# Altium PCB z003.pcbdoc (part 1 of 2)
Units mil, origin at the board's own origin, x right, y up, seen from the top; angles counter-clockwise.
Board outline 7198.91 x 3074 mil, 2 copper layers (Top Layer, Bottom Layer); 161 components, 182 nets, 536 pads, 602 vias.
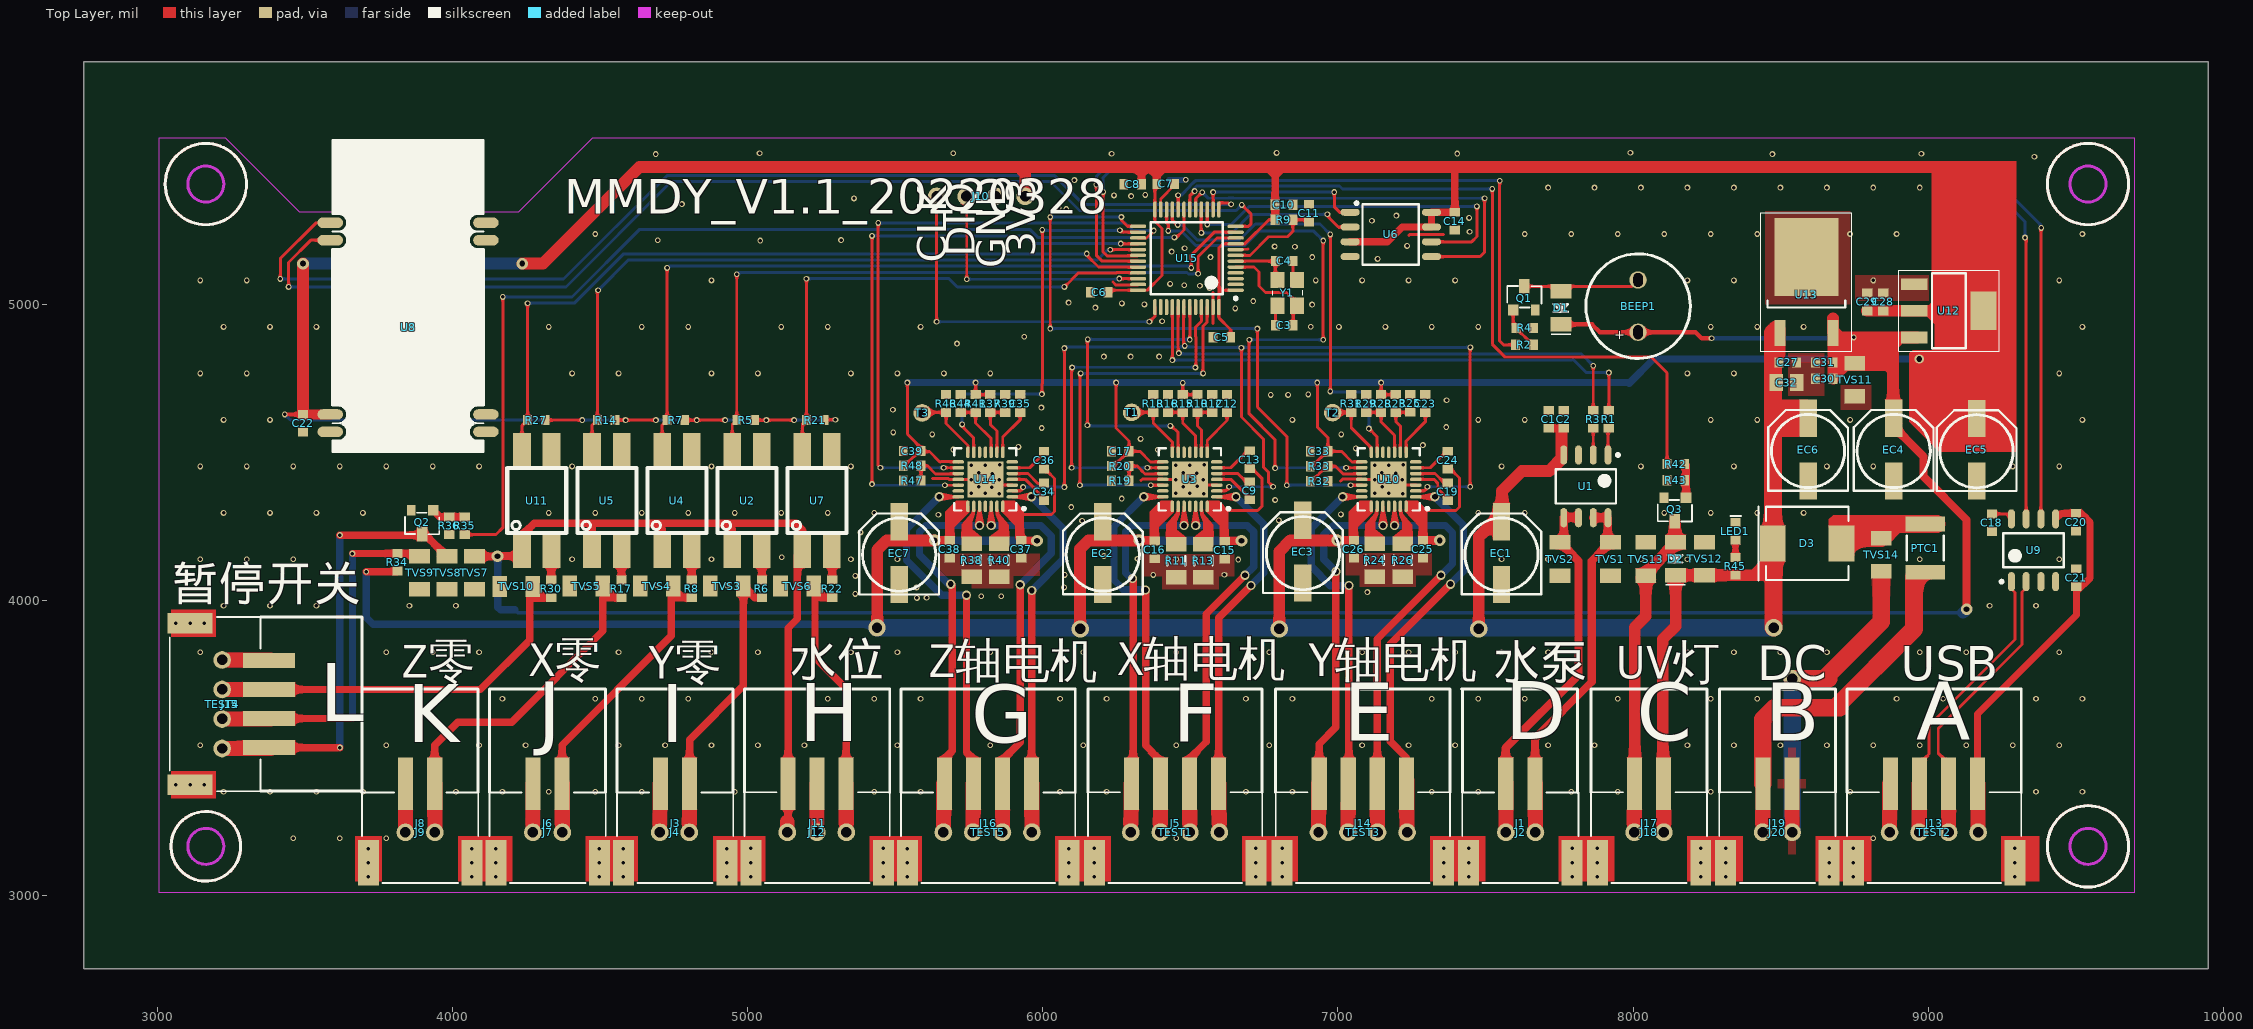
[diagram p0: Top Layer view]
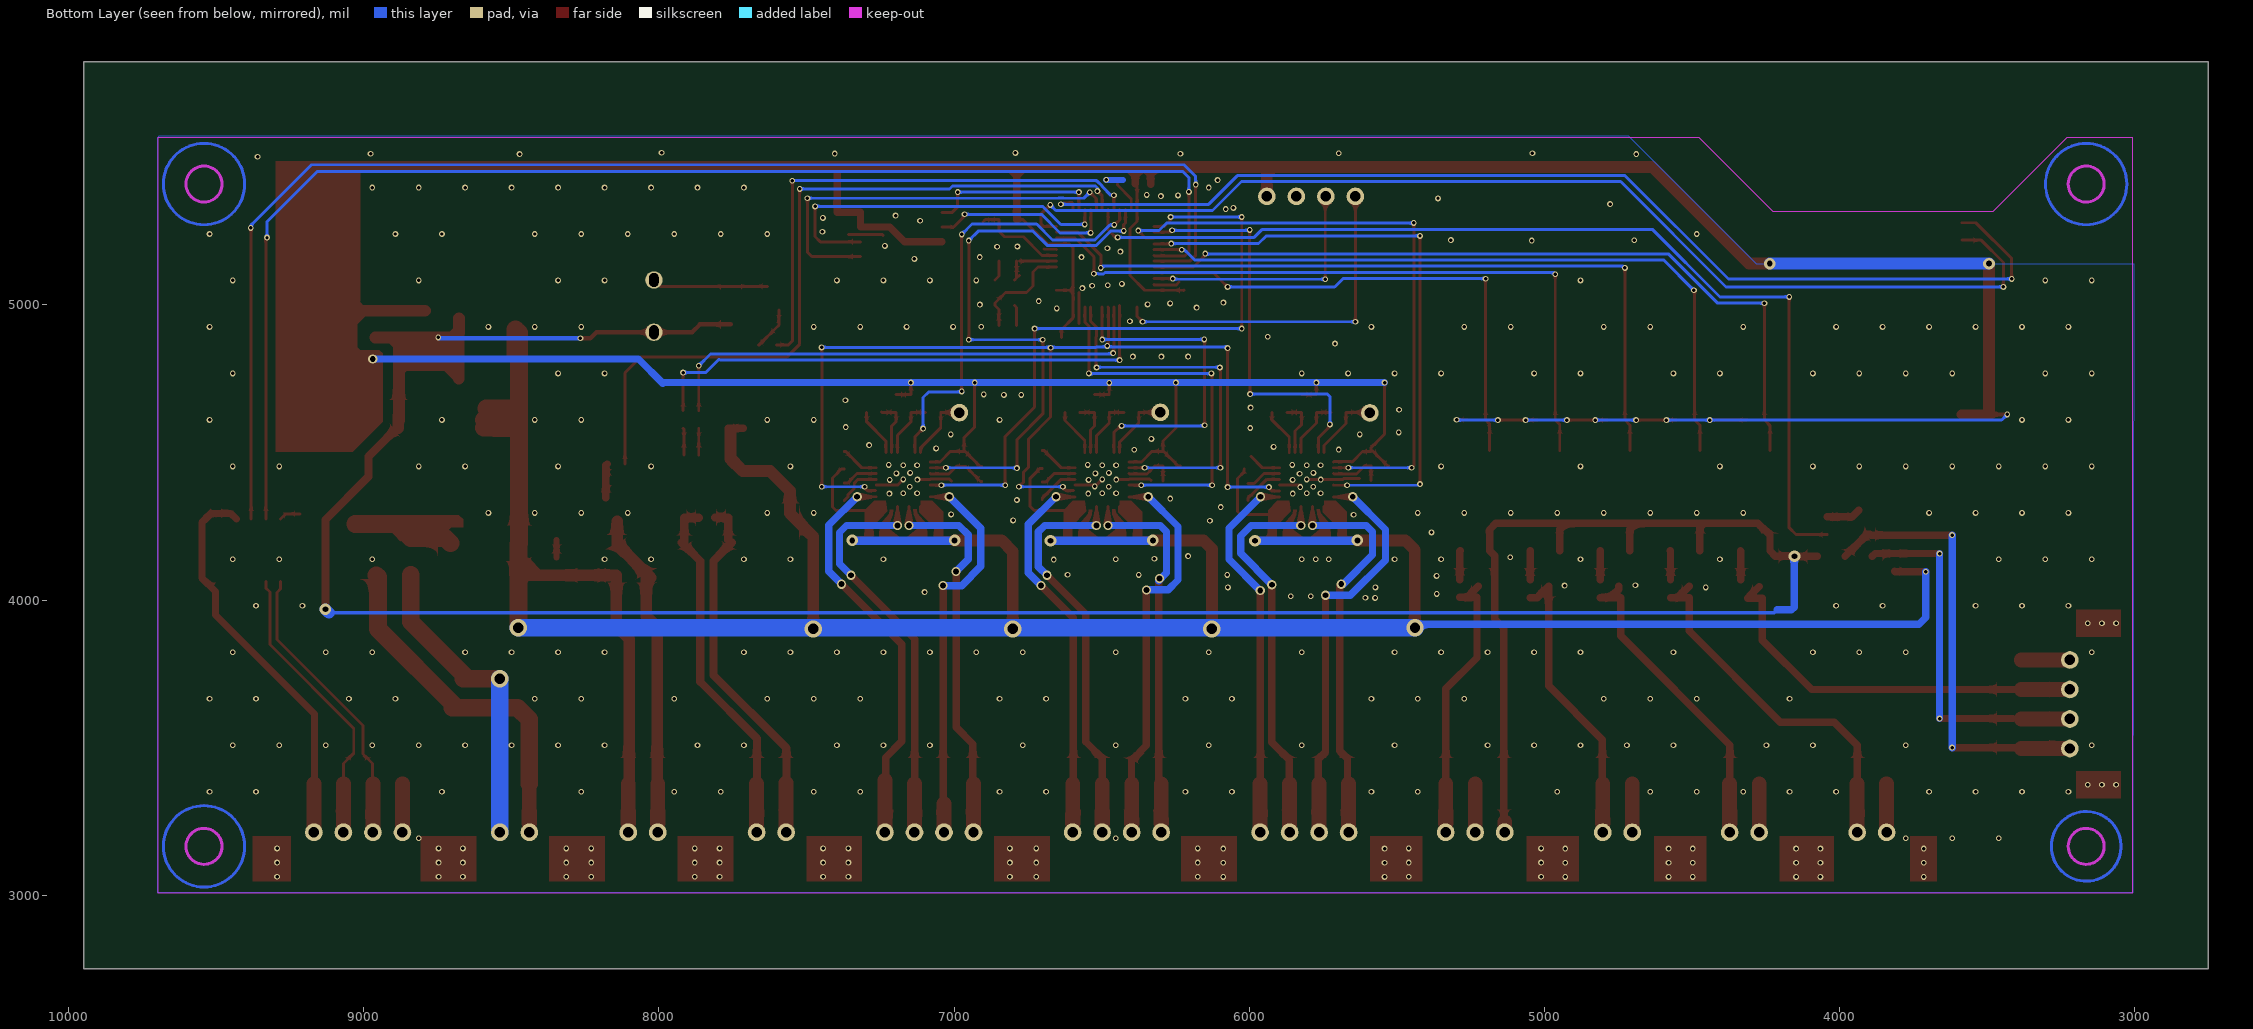
[diagram p1: Bottom Layer view, seen from below]

## Layer stack, top to bottom
Top Layer: signal copper (thickness not stored)
Dielectric: dielectric 12.6, FR-4, Dk 4.8
Bottom Layer: signal copper (thickness not stored)

## Board outline
9948.91,2750 2750,2750 2750,5824 9948.91,5824

## Components (designator, comment, footprint, x,y, rotation, side; value= is the part's Value field where it differs from the comment)
BEEP1 "0905" "Դ 9*5mm" 8017,4996 r90 top
C1 "10uF16V" 0603C 7714,4612 r90 top
C2 "100nF" 0603C 7765,4612 r270 top
C3 "10pF" 0603C 6818,4931 r180 top
C4 "10pF" 0603C 6818,5149 r0 top
C5 "100nF" 0603C 6606,4890 r0 top
C6 "100nF" 0603C 6191,5043 r0 top
C7 "100nF" 0603C 6416,5410 r180 top
C8 "10uF16V" 0603C 6304,5409 r0 top
C9 "22nF" 0603C 6701,4370 r90 top
C10 "100nF" 0603C 6817,5339 r180 top
C11 "100nF" 0603C 6902,5311 r270 top
C12 "2.2uF" 0603C 6624,4666.02 r270 top
C13 "100nF" 0603C 6701,4476 r90 top
C14 "100nF" 0603C 7396,5284 r90 top
C15 "10uF16V" 0603C 6616,4169 r90 top
C16 "10uF16V" 0603C 6379,4170 r90 top
C17 "100nF" 0603C 6262,4504 r180 top
C18 "10nF" 0603C 9216,4262 r90 top
C19 "22nF" 0603C 7372,4367 r90 top
C20 "100nF" 0603C 9501,4264 r90 top
C21 "10uF16V" 0603C 9502,4076 r270 top
C22 "10uF16V" 0603C 3493,4599 r270 top
C23 "2.2uF" 0603C 7296,4666.02 r270 top
C24 "100nF" 0603C 7372,4474 r90 top
C25 "10uF16V" 0603C 7288,4171.99 r90 top
C26 "10uF16V" 0603C 7054,4171.99 r90 top
C27 "100nF" 0603C 8524,4805 r0 top
C28 "100nF" 0603C 8848,5010 r90 top
C29 "10uF16V" 0603C 8793,5010 r270 top
C30 "100nF" 0603C 8648,4750 r180 top
C31 "10uF16V" 0603C 8648,4805 r0 top
C32 "10uF25V" 0805C 8520,4737 r180 top
C33 "100nF" 0603C 6936,4504 r180 top
C34 "22nF" 0603C 6004,4367 r90 top
C35 "2.2uF" 0603C 5923,4666 r270 top
C36 "100nF" 0603C 6004,4474 r90 top
C37 "10uF16V" 0603C 5927,4172 r90 top
C38 "10uF16V" 0603C 5685,4172 r90 top
C39 "100nF" 0603C 5557,4505 r180 top
D1 "1N4148W" SOD-123 7756,4990 r270 top
D2 "1N4148W" SOD-123 8144,4140 r270 top
D3 "SS34" SMC 8590,4192 r180 top
EC1 "100uF25V" CAP-6.3*7.7 7554,4159.3 r90 top
EC2 "100uF25V" CAP-6.3*7.7 6203,4159.3 r90 top
EC3 "100uF25V" CAP-6.3*7.7 6881,4164 r90 top
EC4 "100uF25V" CAP-6.3*7.7 8883,4510 r90 top
EC5 "100uF25V" CAP-6.3*7.7 9164,4509.3 r90 top
EC6 "100uF25V" CAP-6.3*7.7 8593,4510 r90 top
EC7 "100uF25V" CAP-6.3*7.7 5513,4159 r90 top
J1 "2P" XH-2.54-2P-SMD-ʽ 7617.8,3243.86 r0 top
J2 "2P" D-2.54-2P-G 7669,3213 r270 top
J3 "2P" XH-2.54-2P-SMD-ʽ 4753.8,3243.86 r0 top
J4 "2P" D-2.54-2P-G 4701.8,3212.86 r90 top
J5 "4P" XH-2.54-4P-SMD-ʽ 6448,3244 r0 top
J6 "2P" XH-2.54-2P-SMD-ʽ 4321.8,3243.86 r0 top
J7 "2P" D-2.54-2P-G 4271.8,3212.86 r90 top
J8 "2P" XH-2.54-2P-SMD-ʽ 3890,3243.72 r0 top
J9 "2P" D-2.54-2P-G 3839.8,3212.86 r90 top
J10 "4P" D-2.54-4P-G 5940,5368 r270 top
J11 "3P" XH-2.54-3P-SMD-ʽ 5235,3244 r0 top
J12 "3P" D-2.54-3P-G 5134,3213 r90 top
J13 "4P" XH-2.54-4P-SMD-ʽ 9020,3244 r0 top
J14 "4P" XH-2.54-4P-SMD-ʽ 7084,3244 r0 top
J15 "4P" XH-2.54-4P-SMD-ʽ 3244.14,3647.64 r270 top
J16 "4P" XH-2.54-4P-SMD-ʽ 5814.38,3243.86 r0 top
J17 "2P" XH-2.54-2P-SMD-ʽ 8054,3244 r0 top
J18 "2P" D-2.54-2P-G 8104,3213 r270 top
J19 "2P" XH-2.54-2P-SMD-ʽ 8489,3244 r0 top
J20 "2P" D-2.54-2P-G 8439,3213 r90 top
LED1 "RED" 0603D 8347,4233 r90 top
PTC1 "24V3A" 1812R 8990,4176 r90 top
Q1 "S8050" SOT-23-BJT 7631,5023 r0 top
Q2 "S8050" SOT-23-BJT 3897,4263.9 r180 top
Q3 "SI2302" SOT-23-BJT 8142,4307 r180 top
R1 "1K" 0603R 7918,4612 r270 top
R2 "1K" 0603R 7632,4865 r180 top
R3 "1K" 0603R 7865,4612 r270 top
R4 "10K" 0603R 7633,4922 r180 top
R5 "10K" 0603R 4992.75,4610 r0 top
R6 "1K" 0603R 5048,4038 r90 top
R7 "10K" 0603R 4756.5,4610 r0 top
R8 "1K" 0603R 4810,4038 r90 top
R9 "10K5%" 0603R 6817,5289 r180 top
R10 "0R" 0603R 6524,4666.02 r90 top
R11 "0.1R" 1206R 6452,4133 r90 top
R12 "NC" 0603R 6574,4666.02 r90 top
R13 "0.1R" 1206R 6544,4132.9 r90 top
R14 "10K" 0603R 4520.25,4610 r0 top
R15 "0R" 0603R 6474,4666.02 r90 top
R16 "NC" 0603R 6424,4666.02 r90 top
R17 "1K" 0603R 4572,4038 r90 top
R18 "10K" 0603R 6374,4666.02 r90 top
R19 "3.3K" 0603R 6262,4404 r180 top
R20 "6.6K" 0603R 6262,4454 r180 top
R21 "10K" 0603R 5229,4610 r0 top
R22 "1K" 0603R 5286,4039 r90 top
R23 "0R" 0603R 7196,4666.02 r90 top
R24 "0.1R" 1206R 7125,4134.99 r90 top
R25 "NC" 0603R 7245,4667 r90 top
R26 "0.1R" 1206R 7219,4135 r90 top
R27 "10K" 0603R 4284,4610 r0 top
R28 "0R" 0603R 7146,4666.02 r90 top
R29 "NC" 0603R 7096,4666.02 r90 top
R30 "1K" 0603R 4334,4038 r90 top
R31 "10K" 0603R 7045,4666 r90 top
R32 "3.3K" 0603R 6936,4402 r0 top
R33 "6.6K" 0603R 6936,4453 r180 top
R34 "1K" 0603R 3813,4128 r270 top
R35 "1K" 0603R 4041,4251.9 r270 top
R36 "10K" 0603R 3989,4251.9 r90 top
R37 "0R" 0603R 5822,4666 r90 top
R38 "0.1R" 1206R 5759,4134.9 r90 top
R39 "NC" 0603R 5872,4666 r90 top
R40 "0.1R" 1206R 5852,4135 r90 top
R41 "0R" 0603R 5772,4666 r90 top
R42 "1K" 0603R 8145,4461 r180 top
R43 "10K" 0603R 8145,4406 r0 top
R44 "NC" 0603R 5722,4666 r90 top
R45 "4.7K" 0603R 8347,4114 r270 top
R46 "10K" 0603R 5672,4666 r90 top
R47 "3.3K" 0603R 5557,4405 r180 top
R48 "6.6K" 0603R 5557,4455 r180 top
T1 "测试点" Ե 6301,4636 r180 top
T2 "测试点" Ե 6982,4635 r180 top
T3 "测试点" Ե 5591,4634 r180 top
TEST1 "4P" D-2.54-4P-G 6298,3213 r90 top
TEST2 "4P" D-2.54-4P-G 8869,3213 r90 top
TEST3 "4P" D-2.54-4P-G 6934,3213 r90 top
TEST4 "4P" D-2.54-4P-G 3219,3797 r0 top
TEST5 "4P" D-2.54-4P-G 5663,3213 r90 top
TVS1 "SMFJ16CA" SOD-123 7923,4139 r90 top
TVS2 "SMFJ16CA" SOD-123 7752,4139 r270 top
TVS3 "SMFJ6.0CA" SOD-123 4929,4047 r180 top
TVS4 "SMFJ6.0CA" SOD-123 4691,4047 r180 top
TVS5 "SMFJ6.0CA" SOD-123 4453,4047 r180 top
TVS6 "SMFJ6.0CA" SOD-123 5167,4047 r0 top
TVS7 "SMFJ6.0CA" SOD-123 4074,4092 r90 top
TVS8 "SMFJ16CA" SOD-123 3981,4091.9 r270 top
TVS9 "SMFJ16CA" SOD-123 3888,4092 r270 top
TVS10 "SMFJ6.0CA" SOD-123 4215,4046 r0 top
TVS11 "SMFJ16CA" SOD-123 8751,4746 r90 top
TVS12 "SMFJ16CA" SOD-123 8242,4140 r90 top
TVS13 "SMFJ16CA" SOD-123 8043,4139 r90 top
TVS14 "SMFJ16CA" SOD-123 8841,4154 r90 top
U1 "RZ7899" SOP-8 7840,4385.3 r270 top
U2 "PC817" DIP-4-SMD 4997.5,4337 r90 top
U3 "TMC2208" QFN-28 6498,4409 r180 top
U4 "PC817" DIP-4-SMD 4760,4337 r90 top
U5 "PC817" DIP-4-SMD 4522.5,4337 r90 top
U6 "W25Q16JVSSIQ" SOIC-8 7179,5239 r0 top
U7 "PC817" DIP-4-SMD 5235,4337 r90 top
U8 "HC-06" HC-06 3848.78,4924.11 r0 top
U9 "CH340N" SOP-8 9357,4168.7 r90 top
U10 "TMC2208" QFN-28 7172,4409.01 r180 top
U11 "PC817" DIP-4-SMD 4285,4337 r90 top
U12 "AMS1117-3.3" SOT-223-4 9070,4980 r0 top
U13 "78M05" TO-252 8587.24,5078.23 r90 top
U14 "TMC2208" QFN-28 5805,4409 r180 top
U15 "GD32E230C8T6" LQFP-48 6488,5158 r180 top
Y1 "16M" XTAL-3225-4P 6828,5041 r90 top

## Footprints (in the part's own frame and the unit in brackets; to place one, negate y for a bottom-side part, rotate by r counter-clockwise, add the part's x,y. Pads: shape width x height; smd on the part's side, far side on the other; paste and mask are expansions set on the pad)
0603C [mil]
  rect 30x35 smd mask+4: 1(-30,0) 2(30,0)
0603D [mil]
  rect 30x35 smd mask+4: 1(-30,0) 2(30,0)
  silkscreen extent 52,-19 52,18
0603R [mil]
  rect 30x35 smd mask+4: 1(-30,0) 2(30,0)
0805C [mm]
  rect 1.15x1.45 smd mask+0.102: 1(-0.875,0) 2(0.875,0)
1206R [mm]
  rect 1.25x1.75 smd mask+0.102: 1(-1.425,0) 2(1.425,0)
  silkscreen extent -0.4,-0.77 0.4,0.77
1812R [mm]
  rect 1.25x3.4 smd mask+0.102: 1(-2.075,0) 2(2.075,0)
  silkscreen extent -1.05,-1.6 1.05,1.6
CAP-6.3*7.7 [mm]
  rect 3.2x1.5 smd mask+0.102: 1(2.7,0) 2(-2.7,0)
  silkscreen extent -3.56,-3.43 3.4,3.43
D-2.54-2P-G [mil]
  round 60 hole 35.43 mask+4: 1(0,0) 2(0,-100)
D-2.54-3P-G [mil]
  round 60 hole 35.43 mask+4: 1(0,0) 2(0,-100) 3(0,-200)
D-2.54-4P-G [mil]
  round 60 hole 35.43 mask+4: 1(0,0) 2(0,-100) 3(0,-200) 4(0,-300)
DIP-4-SMD [mm]
  rect 3x1.524 smd mask+0.102: 1(-4.31,1.27) 2(-4.31,-1.27) 3(4.31,-1.27) 4(4.31,1.27)
  silkscreen extent -2.79,-2.54 2.79,2.54
HC-06 [mm]
  oval 2.2x0.9 smd mask+0.102: 1(-6.7,9) 2(-6.7,7.5) 12(-6.7,-7.5) 13(-6.7,-9) 22(6.7,-9) 23(6.7,-7.5) 33(6.7,7.5) 34(6.7,9)
  silkscreen extent -6.5,-10.75 6.5,16.15
LQFP-48 [mm]
  oval 1.4x0.3 smd mask+0.102: 1(-4.2,2.75) 2(-4.2,2.25) 3(-4.2,1.75) 4(-4.2,1.25) 5(-4.2,0.75) 6(-4.2,0.25) 7(-4.2,-0.25) 8(-4.2,-0.75) 9(-4.2,-1.25) 10(-4.2,-1.75) 11(-4.2,-2.25) 12(-4.2,-2.75) 25(4.2,-2.75) 26(4.2,-2.25) 27(4.2,-1.75) 28(4.2,-1.25) 29(4.2,-0.75) 30(4.2,-0.25) 31(4.2,0.25) 32(4.2,0.75) 33(4.2,1.25) 34(4.2,1.75) 35(4.2,2.25) 36(4.2,2.75)
  oval 0.3x1.4 smd mask+0.102: 13(-2.75,-4.2) 14(-2.25,-4.2) 15(-1.75,-4.2) 16(-1.25,-4.2) 17(-0.75,-4.2) 18(-0.25,-4.2) 19(0.25,-4.2) 20(0.75,-4.2) 21(1.25,-4.2) 22(1.75,-4.2) 23(2.25,-4.2) 24(2.75,-4.2) 37(2.75,4.2) 38(2.25,4.2) 39(1.75,4.2) 40(1.25,4.2) 41(0.75,4.2) 42(0.25,4.2) 43(-0.25,4.2) 44(-0.75,4.2) 45(-1.25,4.2) 46(-1.75,4.2) 47(-2.25,4.2) 48(-2.75,4.2)
  silkscreen extent -4.33,-3.1 3.1,3.57
QFN-28 [mm]
  oval 1x0.3 smd mask+0.102: 1(-2.325,1.5) 2(-2.325,1) 3(-2.325,0.5) 4(-2.325,0) 5(-2.325,-0.5) 6(-2.325,-1) 7(-2.325,-1.5) 15(2.325,-1.5) 16(2.325,-1) 17(2.325,-0.5) 18(2.325,0) 19(2.325,0.5) 20(2.325,1) 21(2.325,1.5)
  oval 0.3x1 smd mask+0.102: 8(-1.5,-2.325) 9(-1,-2.325) 10(-0.5,-2.325) 11(0,-2.325) 12(0.5,-2.325) 13(1,-2.325) 14(1.5,-2.325) 22(1.5,2.325) 23(1,2.325) 24(0.5,2.325) 25(0,2.325) 26(-0.5,2.325) 27(-1,2.325) 28(-1.5,2.325)
  rect 3.1x3.1 smd mask+0.102: 29(0,0)
  silkscreen extent -3.45,-2.68 2.68,2.67
SMC [mm]
  rect 2.2x3.1 smd mask+0.102: 1(-2.95,0) 2(2.95,0)
  silkscreen extent -3.55,-3.15 4.19,3.18
SOD-123 [mm]
  rect 1.25x1.8 smd mask+0.102: 1(-1.425,0) 2(1.425,0)
  silkscreen extent -0.33,-0.84 2.26,0.84
SOIC-8 [mm]
  oval 1.65x0.6 smd mask+0.102: 1(-3.5,1.905) 2(-3.5,0.635) 3(-3.5,-0.635) 4(-3.5,-1.905) 5(3.5,-1.905) 6(3.5,-0.635) 7(3.5,0.635) 8(3.5,1.905)
  silkscreen extent -3.07,-2.6 2.4,2.82
SOP-8 [mm]
  oval 1.65x0.6 smd mask+0.102: 1(-2.7,1.905) 2(-2.7,0.635) 3(-2.7,-0.635) 4(-2.7,-1.905) 5(2.7,-1.905) 6(2.7,-0.635) 7(2.7,0.635) 8(2.7,1.905)
  silkscreen extent -2.82,-2.6 1.48,2.88
SOT-23-BJT [mil]
  rect 36x36 smd mask+4: b(-37.5,-40)
  rect 36x50 smd mask+4: c(0.5,40)
  rect 30x36 smd mask+4: e(37.5,-40)
  silkscreen extent -58,-32 58,41
SOT-223-4 [mm]
  rect 2.25x1 smd mask+0.102: 1(-2.975,-2.29) 2(-2.975,2.29) 3(-2.975,0)
  rect 2.25x3.3 smd mask+0.102: 3(2.975,0)
  silkscreen extent -4.32,-3.48 4.32,3.51
TO-252 [mm]
  rect 2.2x0.95 smd mask+0.102: 1(-4.4,2.28) 3(-4.4,-2.28)
  rect 6.7x5.5 smd mask+0.102: 2(2.15,0)
  silkscreen extent -6.02,-3.91 5.97,3.94
XH-2.54-2P-SMD-ʽ [mm]
  rect 1.8x3.9 smd mask+0.102: 0(-4.45,-3.4) 0(4.45,-3.4)
  rect 1.3x4.5 smd mask+0.102: 1(-1.25,3.4) 2(1.25,3.4)
  silkscreen extent -5,-5.15 5,2.65
XH-2.54-3P-SMD-ʽ [mm]
  rect 1.8x3.9 smd mask+0.102: 0(-5.7,-3.4) 0(5.7,-3.4)
  rect 1.3x4.5 smd mask+0.102: 1(-2.5,3.4) 2(0,3.4) 3(2.5,3.4)
  silkscreen extent -6.25,-5.15 6.25,2.65
XH-2.54-4P-SMD-ʽ [mm]
  rect 1.8x3.9 smd mask+0.102: 0(-6.95,-3.4) 0(6.95,-3.4)
  rect 1.3x4.5 smd mask+0.102: 1(-3.75,3.4) 2(-1.25,3.4) 3(1.25,3.4) 4(3.75,3.4)
  silkscreen extent -7.5,-5.15 7.5,2.65
XTAL-3225-4P [mm]
  rect 1.4x1.2 smd mask+0.102: 1(-1.1,-0.85) 2(1.1,-0.85) 3(1.1,0.85) 4(-1.1,0.85)
  silkscreen extent -0.2,-1.32 0.2,1.23
"Դ 9*5mm" [mm]
  round 1.5 hole 0.8 slot 1.2 at 0 deg mask+0.102: 1(-2.25,0) 2(2.25,0)
  silkscreen extent -4.5,-4.5 4.5,4.5
Ե [mil]
  round 60 hole 35.43 mask+4: 1(0,0)

## Via types
v1: diameter 19.68, hole 11.81, Top Layer to Bottom Layer, 561 vias
v2: diameter 31.5, hole 19.68, Top Layer to Bottom Layer, 25 vias
v3: diameter 39.37, hole 19.68, Top Layer to Bottom Layer, 10 vias
v4: diameter 59.06, hole 35.43, Top Layer to Bottom Layer, 6 vias

## Nets (pads, with @x,y where several pads share a name; then routed paths per layer and width w, separated by ;. In a path a pad name is that pad's centre, name@x,y a point inside that pad or via, vN(x,y) a via of type N, cw(c..) or ccw(c..) an arc to the next point about the centre after c; other vN are vias at no path point)
3V3: C5.2 C6.2 C7.2 C8.2 C10.2 C14.2 C17.1 C22.1 C28.1 C29.2 C33.1 C39.1 EC5.1 J10.1 R5.2 R7.2 R9.2 R10.2 R14.2 R15.2 R20.2 R21.2 R23.2 R27.2 R28.2 R33.2 R37.2 R41.2 R48.2 U3.15 U6.3 U6.7 U6.8 U8.12 U10.15 U12.3 U14.15 U15.1 U15.9 U15.24 U15.36 U15.48 | length 16798.9
  Top Layer w10: v1(3431,4629) C22.1@3493,4629 C22.1@3493.17,4628.83 ; 4306,5140 4314,5132 ; R27.2@4313,4611 R27.2@4314,4610 v1(4439,4610) ; R14.2@4550.25,4610 v1(4586,4610) v1(4689,4610) ; R7.2@4786.5,4610 v1(4827,4610) v1(4923,4610) ; R5.2@5022.75,4610 v1(5063,4610) v1(5157,4610) ; R21.2@5259,4610 5260,4611 v1(5297,4611) ; R48.2@5527,4455 5531,4455 5581,4505 C39.1@5587,4505 ; v1(5541,4737) 5541,4562 5587,4516 5587,4503 5616,4503 5650.94,4468.06 5653.58,4468.06 5654.74,4469.21 5712.31,4469.21 U14.15@5713.46,4468.06 ; v1(5772,4737) R41.2@5772,4696 R37.2@5822,4696 ; C6.2@6221,5050 C6.2@6221.27,5049.73 ; C6.2@6222,5049 C6.2@6221.27,5049.73 ; R20.2@6232,4454 6240,4454 6290,4504 C17.1@6292,4504 ; v1(6248,4737) 6248,4583 6292,4539 C17.1@6292,4504 ; 6322,5451 6331,5442 ; C8.2@6333,5408 C8.2@6334,5409 ; 6367.73,5453 6376.73,5444 ; C7.2@6379.73,5410 U15.24@6379.73,5323.35 6379.73,5283 6404,5258.73 6404,5100 6353.73,5049.73 U15.36@6322.65,5049.73 C6.2@6221.27,5049.73 ; 6382,5467 6379.73,5464.73 6379.73,5443 6386,5449.27 ; U3.15@6406.46,4468.06 6364.94,4468.06 6329,4504 C17.1@6292,4504 ; v1(6474,4736) R15.2@6474,4696.02 R10.2@6524,4696.02 ; 6595.54,5059.46 6596.27,5058.73 ; 6605,5050 6596.27,5058.73 ; C5.2@6636,4890 6636,4917 6596.27,4956.73 U15.48@6596.27,4992.65 6596.27,5040.27 ; U15.1@6653.35,5049.73 6605.73,5049.73 6596.27,5040.27 ; 6775,5452 6784,5443 ; 6784,5467 6787,5464 ; R9.2@6787,5289 6766,5289 6684.21,5207.21 U15.9@6653.35,5207.21 6610.21,5207.21 6596.27,5193.27 6596.27,5058.73 ; 6787,5462 6791,5466 ; R33.2@6906,4453 6912,4453 6963,4504 C33.1@6966,4504 ; v1(6930,4737) 6930,4586 6966,4550 C33.1@6966,4504 ; U10.15@7080.46,4468.06 7047.94,4468.06 7012,4504 C33.1@6966,4504 ; v1(7146,4737) R28.2@7146,4696.02 R23.2@7196,4696.02 ; 7396,5462 7401,5467 ; 8955,4802 v2(8970,4817) ; 6596.27,5040.27 6596.27,5058.73
  Top Layer w15: 5903.52,5464.48 5930,5438
  Top Layer w23.62: 7218,5264 U6.7@7316.8,5264
  Top Layer w25: 6310,5467 6334,5443 C8.2@6334,5409 ; 6335,5444 6359,5468 ; 6361,5462 6385,5438 ; 6383.73,5467 6386,5464.73 6386,5449.27 C7.2@6386,5410 ; 6386,5438 6410,5462 ; 6763,5462 6787,5438 ; R9.2@6787,5289 C10.2@6787,5339 6787,5462 6787,5464 ; 6788,5437 6812,5461 ; U6.3@7041.2,5214 7168,5214 7218,5264 ; U6.7@7316.8,5264 U6.8@7316.8,5314 C14.2@7396,5314 7396,5462
  Top Layer w35: C22.1@3493.17,4628.83 U8.12@3585,4628.83
  Top Layer w39.37: J10.1@5940,5378 5940,5449
  Top Layer w40: C22.1@3493,4629 v3(3493,5140) ; v3(4236,5140) 4306,5140 4633,5467 6310,5467 6382,5467 ; 6383.73,5467 6784,5467 7401,5467 9033,5467 ; C29.2@8793,4980 C28.1@8848,4980 U12.3@8952.87,4980 U12.3@9164,4980 ; EC5.1@9164,4630.3 U12.3@9164,4980 ; U12.3@9164,5004.3 U12.3@9164,4980 ; U12.3@9167,4980 U12.3@9164,4980
  Bottom Layer w10: v1(3431,4629) 3450,4610 v1(4439,4610) v1(4586,4610) ; v1(4689,4610) v1(4827,4610) ; v1(4923,4610) v1(5063,4610) ; v1(5157,4610) 5296,4610 v1(5297,4611) ; v1@6473,4737 v1(6474,4736) ; v1@6928,4737 v1(6930,4737)
  Bottom Layer w25: v1@5542,4737 v1(5772,4737) v1(6248,4737) 6473,4737 v1@6928,4737 ; v1(6930,4737) v1(7146,4737) 7985,4737 7987,4735 8069,4817 v2(8970,4817)
  Bottom Layer w40: v3(3493,5140) v3(4236,5140)
5V: BEEP1.1 C30.1 C31.2 D1.2 EC4.1 J11.1 J12.1 TVS7.2 TVS11.2 U2.1 U4.1 U5.1 U7.1 U11.1 U12.1 U13.3 | length 10358.1
  Top Layer w15: D1.2@7756,4933.9 7861.1,4933.9 7887.58,4907.42 BEEP1.1@8017,4907.42 8211.58,4907.42 8232,4887 v1(8266,4887)
  Top Layer w25: TVS7.2@4074,4148.1 v3(4152.1,4148.1) 4153,4149 4216.69,4149 U11.1@4235,4167.31 4235,4219 4276,4260 4458,4260 ; U5.1@4472.5,4167.31 4472.5,4245.5 4458,4260 ; U4.1@4710,4167.31 4710,4240 4690,4260 ; U2.1@4947.5,4167.31 4947.5,4239.5 4927,4260 ; J12.1@5134,3213 5136.57,3215.57 J11.1@5136.57,3377.86 5136.57,3904.57 5168,3936 5168,4150.31 U7.1@5185,4167.31 5185,4239 5164,4260 4927,4260 ; 4458,4260 4690,4260 ; 4690,4260 4927,4260
  Top Layer w27.56: EC4.1@8883,4588 8984,4487 8984,4418 9130,4272 v3(9130,3969)
  Top Layer w40: U13.3@8677,4905 8677,4955 ; C30.1@8678,4750 C31.2@8678,4805 U13.3@8678,4900 ; U13.3@8684.84,4875.84 8698.84,4889.84 ; U13.3@8684.84,4906.16 8700,4891 8698.84,4889.84 ; U13.3@8685,4889.84 8698.84,4889.84 ; 8863,4883 8878.16,4867.84 ; EC4.1@8881,4608 8881,4885 ; 8881.84,4864.84 8897,4880 ; EC4.1@8883,4583 8883,4588 EC4.1@8883,4616.3 EC4.1@8883,4625.3 ; U12.1@8961,4889.84 U12.1@8952.87,4889.84 v1(8748,4889.84) 8698.84,4889.84
  Top Layer w50: J12.1@5134,3213 5134,3249
  Bottom Layer w10: v1@8745.16,4887 v1(8748,4889.84)
  Bottom Layer w11.81: 4211,3967 4221,3957 v3@9118,3957
  Bottom Layer w15: v1(8266,4887) v1@8745.16,4887
  Bottom Layer w25: v3@4153,4149 4153,3976 4162,3967 4211,3967
  Bottom Layer w40: v3@9118,3957 v3(9130,3969)
DEBUG_CLK: J10.4 U15.37 | length 1203.4
  Top Layer w10: v1(5640,4943) J10.4@5640,5368 ; v1(6361,4943) 6379.73,4961.73 U15.37@6379.73,4992.65
  Bottom Layer w10: v1(5640,4943) v1(6361,4943)
DEBUG_DIO: J10.3 U15.34 | length 863.3
  Top Layer w10: J10.3@5740,5368 5742,5366 v1(5742,5087) ; v1(6258.9,5089.1) U15.34@6322.65,5089.1
  Bottom Layer w10: v1(5742,5087) 6256.8,5087 v1(6258.9,5089.1)
FLASH_CS: U6.1 U15.14 | length 581.3
  Top Layer w10: U15.14@6576.58,5323.35 v1(6576.58,5382.42) ; v1(6987.58,5382.42) 6987.58,5332.42 7006,5314 U6.1@7041.2,5314
  Bottom Layer w10: v1(6576.58,5382.42) v1(6987.58,5382.42)
FLASH_MISO: U6.2 U15.16 | length 631.3
  Top Layer w10: v1(6537.21,5244.21) 6536.16,5245.27 6536.16,5322.3 U15.16@6537.21,5323.35 ; v1(6964,5307) 6964,5301 7001,5264 U6.2@7041.2,5264
  Bottom Layer w10: v1(6537.21,5244.21) 6641.21,5244.21 6704,5307 v1(6964,5307)
FLASH_MOSI: U6.5 U15.17 | length 1402
  Top Layer w10: U15.17@6517.53,5323.35 6517.53,5359.53 v1(6540,5382) ; U6.5@7316.8,5164 7482,5164 7496.57,5178.57 v1(7496.57,5361.57)
  Bottom Layer w10: v1(6540,5382) 6560.43,5361.57 6629.1,5361.57 6629.37,5361.84 6646.63,5361.84 6646.9,5361.57 v1(7496.57,5361.57)
FLASH_SCK: U6.6 U15.15 | length 1253.3
  Top Layer w10: U15.15@6556.9,5323.35 6556.9,5273.1 v1(6557,5273) ; U6.6@7316.8,5214 7453,5214 7471,5232 v1(7471,5334)
  Bottom Layer w10: v1(6557,5273) 6638,5273 6699,5334 v1(7471,5334)
GND: C1.2 C2.1 C3.2 C4.2 C5.1 C6.1 C7.1 C8.1 C10.1 C11.1 C12.1 C14.1 C15.1 C16.1 C17.2 C18.1 C20.1 C21.1 C22.2 C23.1 C25.1 C26.1 C27.2 C28.2 C29.1 C30.2 C31.1 C32.1 C33.2 C35.1 C37.1 C38.1 C39.2 EC1.2 EC2.2 EC3.2 EC4.2 EC5.2 EC6.2 EC7.2 J3.1 J4.1 J6.1 J7.1 J8.1 J9.1 J10.2 J11.2 J12.2 J13.1 J15.1 J19.2 J20.2 LED1.2 Q1.e Q2.e Q3.e R4.1 R11.1 R12.2 R13.1 R16.2 R18.2 R19.2 R24.1 R25.2 R26.1 R29.2 R31.2 R32.2 R36.1 R38.1 R39.2 R40.1 R43.1 R44.2 R46.2 R47.2 TEST2.1 TEST4.1 TVS1.1 TVS2.2 TVS3.2 TVS4.2 TVS5.2 TVS6.1 TVS7.1 TVS8.2 TVS9.2 TVS10.1 TVS11.1 TVS12.2 TVS13.2 TVS14.1 U1.3 U2.3 U3.3 U3.18 U3.29 U4.3 U5.3 U6.4 U7.3 U8.13 U9.3 U10.3 U10.18 U10.29 U11.3 U12.2 U13.2 U14.3 U14.18 U14.29 U15.8 U15.23 U15.35 U15.44 U15.47 Y1.2 Y1.4 | length 3580.9
  Top Layer w10: 5626.53,4411.53 5679.46,4411.53 5681.99,4409 U14.18@5713.46,4409 v1(5805,4409) ; U14.29@5824.69,4389.31 U14.3@5896.54,4389.31 ; 6237.23,5077.5 6246.47,5068.26 6321.49,5068.26 U15.35@6322.65,5069.42 ; 6332,4405 6337.16,4410.16 6405.31,4410.16 U3.18@6406.46,4409 U3.29@6450,4409 ; U15.23@6399.42,5323.35 6399.42,5359.42 6446,5406 C7.1@6446,5410 ; v1(6484,5424) v1@6484,5426 ; v1(6498,4409) 6517.69,4389.31 U3.3@6589.54,4389.31 ; 6576.58,4936.42 U15.47@6576.58,4992.65 6576.58,5042.42 ; U15.8@6653.35,5187.53 6695,5189 ; C3.2@6788,4931 6788,4991.16 Y1.4@6794.54,4997.69 ; C4.2@6848,5149 6848,5097.77 Y1.2@6861.46,5084.31 ; 7009,4403 7016.17,4410.17 7079.31,4410.17 U10.18@7080.46,4409.01 U10.29@7124,4409.01 ; v1(7172,4409.01) 7191.69,4389.32 U10.3@7263.54,4389.32 ; 7240,5236 7243,5239 7357,5239
  Top Layer w50: TEST4.1@3219,3797 J15.1@3383.65,3797 ; J9.1@3839.8,3212.86 J8.1@3839.8,3377.5 ; J7.1@4271.8,3212.86 J6.1@4271.8,3377.5 ; J4.1@4701.8,3212.86 J3.1@4701.8,3377.5 ; J12.2@5234,3213 J11.2@5234,3377.65 ; J20.2@8539,3213 J19.2@8539,3377.65 ; TEST2.1@8869,3213 J13.1@8869,3377.65
  Top Layer w60: v4(8539,3733) 8663,3733 ; 8648,3733 8841,3926 TVS14.1@8841,4085
  Bottom Layer w10: v1(6484,5424) v1@6485,5423
  Bottom Layer w19.68: 6427,5423 v1@6485,5423
  Bottom Layer w60: J20.2@8539,3213 v4(8539,3733)
  other v1: 3459.8,3193.12 3617.28,3193.12 3774.76,3193.12 6451.92,3193.12 3223.57,3350.6 3381.06,3350.6 3538.54,3350.6 3696.02,3350.6 4010.98,3350.6 4168.46,3350.6 4325.94,3350.6 4483.42,3350.6 4640.9,3350.6 4955.86,3350.6 5428.3,3350.6 5585.78,3350.6 6058.22,3350.6 6215.7,3350.6 6688.14,3350.6 6845.62,3350.6 7318.06,3350.6 7475.54,3350.6 7790.5,3350.6 7947.98,3350.6 8262.94,3350.6 8735.39,3350.6 9365.31,3350.6 9522.79,3350.6 3144.83,3508.08 3774.76,3508.08 4089.72,3508.08 4247.2,3508.08 4562.16,3508.08 4719.64,3508.08 4877.12,3508.08 5034.6,3508.08 5192.08,3508.08 5507.04,3508.08 5822,3508.08 6136.96,3508.08 6451.92,3508.08 6766.88,3508.08 7081.84,3508.08 7239.32,3508.08 7396.8,3508.08 7711.76,3508.08 7869.24,3508.08 8184.2,3508.08 8341.68,3508.08 8499.17,3508.08 8656.65,3508.08 8814.13,3508.08 8971.61,3508.08 9129.09,3508.08 9286.57,3508.08 9444.05,3508.08 4168.46,3665.56 4483.42,3665.56 4640.9,3665.56 4798.38,3665.56 5270.82,3665.56 5428.3,3665.56 5585.78,3665.56 6058.22,3665.56 6215.7,3665.56 6688.14,3665.56 6845.62,3665.56 7318.06,3665.56 7475.54,3665.56 7633.02,3665.56 7947.98,3665.56 8262.94,3665.56 8420.42,3665.56 8892.87,3665.56 9050.35,3665.56 9365.31,3665.56 9522.79,3665.56 3144.83,3823.04 3774.76,3823.04 3932.24,3823.04 4089.72,3823.04 4562.16,3823.04 4877.12,3823.04 5034.6,3823.04 5192.08,3823.04 5349.56,3823.04 5507.04,3823.04 5822,3823.04 6136.96,3823.04 6451.92,3823.04 6766.88,3823.04 6924.36,3823.04 7081.84,3823.04 7239.32,3823.04 7396.8,3823.04 7554.28,3823.04 7711.76,3823.04 8184.2,3823.04 8341.68,3823.04 8499.17,3823.04 8656.65,3823.04 8971.61,3823.04 9129.09,3823.04 9444.05,3823.04 3223.57,3980.52 3381.06,3980.52 3538.54,3980.52 3853.5,3980.52 4010.98,3980.52 9207.83,3980.52 9365.31,3980.52 5573,4007 5606,4008 5791,4013 5859,4013 5364,4021 7100,4027 4453,4043 5572,4043 6072,4043 4931,4049 4691,4050 5365,4082 6074,4085 6374,4085 6615,4086 6662,4137 3144.83,4138 3302.32,4138 3459.8,4138 4404.68,4138 4877.12,4138 5349.56,4138 5507.04,4138 5730,4138 5774,4138 5822,4138 6451.92,4138 7239.32,4138 7554.28,4138 7711.76,4138 8026.72,4138 8184.2,4138 8971.61,4138 9286.57,4138 9444.05,4138 6321,4140 5115,4145 6207,4149 5382,4229 6133,4269 6800,4270 5646,4289 7010,4290 3223.57,4295.48 3381.06,4295.48 3538.54,4295.48 3696.02,4295.48 4325.94,4295.48 4483.42,4295.48 4640.9,4295.48 4798.38,4295.48 4955.86,4295.48 5113.34,4295.48 5270.82,4295.48 5428.3,4295.48 7475.54,4295.48 7633.02,4295.48 8105.46,4295.48 8262.94,4295.48 8420.42,4295.48 8577.91,4295.48 6096,4315 6787,4339 6267,4344 5852,4361 6545,4361 7219,4361.01 5758,4362 5805,4362 6451,4362 6498,4362 7125,4362.01 7172,4362.01 5827,4383 5783,4384 6476,4384 7150,4384.01 6523,4385 5853,4407 6544,4407 7218,4407.01 5757,4408 6450,4408 7124,4408.01 5829,4428 6521,4429 7195,4429.01 5782,4431 6475,4431 7149,4431.01 3144.83,4452.96 3302.32,4452.96 3459.8,4452.96 3617.28,4452.96 3774.76,4452.96 3932.24,4452.96 4089.72,4452.96 4404.68,4452.96 4877.12,4452.96 5349.56,4452.96 7554.28,4452.96 8026.72,4452.96 8341.68,4452.96 8656.65,4452.96 8814.13,4452.96 9286.57,4452.96 9444.05,4452.96 5758,4457 5805,4457 6451,4457 6498,4457 7125,4457.01 7172,4457.01 5854,4458 6547,4458 7221,4458.01 6389,4509 5696,4510 7061,4514 5917,4519 7288,4525 6331,4546 5625,4561 7011,4561 5493,4568 5996,4583 7367,4586 3223.57,4610.44 3381.06,4610.44 6845.62,4610.44 7475.54,4610.44 7633.02,4610.44 8262.94,4610.44 8420.42,4610.44 8735.39,4610.44 9522.79,4610.44 5492,4645 5995,4652 7368,4677 6772,4695 6831,4695 6899,4697 3144.83,4767.92 3302.32,4767.92 3617.28,4767.92 3774.76,4767.92 3932.24,4767.92 4089.72,4767.92 4404.68,4767.92 4562.16,4767.92 4877.12,4767.92 5034.6,4767.92 5349.56,4767.92 5507.04,4767.92 5664.52,4767.92 5822,4767.92 8184.2,4767.92 8341.68,4767.92 9444.05,4767.92 6207,4825 6297,4825 6394,4825 5709,4869 5937,4892 3223.57,4925.4 3381.06,4925.4 3538.54,4925.4 3696.02,4925.4 3853.5,4925.4 4010.98,4925.4 4325.94,4925.4 4640.9,4925.4 4798.38,4925.4 5113.34,4925.4 5270.82,4925.4 5585.78,4925.4 7003.1,4925.4 7160.58,4925.4 7318.06,4925.4 7475.54,4925.4 8262.94,4925.4 8420.42,4925.4 8577.91,4925.4 9522.79,4925.4 6908,4926 6404,4945 6652,4988 6178,4991 6912,5001 6344,5002 6268,5005 6087,5008 6713,5013 6565,5057 6532,5065 6479,5067 6431,5071 3144.83,5082.88 3302.32,5082.88 4877.12,5082.88 6924.36,5082.88 7081.84,5082.88 7239.32,5082.88 7396.8,5082.88 8184.2,5082.88 8341.68,5082.88 8814.13,5082.88 9444.05,5082.88 7134,5156 6568,5162 6913,5162 6436,5181 6480,5192 6854,5197 6785,5198 7234,5200 5042,5218 4695,5219 5316,5220 4483.42,5240.36 7633.02,5240.36 7790.5,5240.36 7947.98,5240.36 8105.46,5240.36 8262.94,5240.36 8420.42,5240.36 8735.39,5240.36 8892.87,5240.36 9522.79,5240.36 7446,5248 7115,5285 7444,5295 7198,5303 6079,5325 6053,5329 4777,5342 5360,5361 6299,5369 6241,5371 6347,5373 6136.96,5397.84 7711.76,5397.84 7869.24,5397.84 8026.72,5397.84 8184.2,5397.84 8341.68,5397.84 8499.17,5397.84 8656.65,5397.84 8814.13,5397.84 8971.61,5397.84 6107,5423 9360,5502 4688,5511 8472,5511 6233,5512 8977,5512 7404,5513 5040,5514 5696,5514 6792,5515 7991,5516
INPUT1: R5.1 U2.4 U15.10 | length 2382.8
  Top Layer w10: U2.4@4947.5,4506.69 4947.5,4594.75 R5.1@4962.75,4610 v1(4962.75,5103.75) ; v1(6526,5106) 6526,5163 6589.9,5226.9 U15.10@6653.35,5226.9
  Bottom Layer w10: v1(4962.75,5103.75) 4968.94,5109.94 6488.58,5109.94 6493.87,5104.66 6511.13,5104.66 6512.48,5106 v1(6526,5106)
Input1: 
INPUT2: R7.1 U4.4 U15.11 | length 2633.2
  Top Layer w10: U4.4@4710,4506.69 4710,4593.5 R7.1@4726.5,4610 v1(4726.5,5125.5) ; v1(6502.5,5125.5) 6502.5,5168.5 6580.58,5246.58 U15.11@6653.35,5246.58
  Bottom Layer w10: v1(4726.5,5125.5) 4733,5132 6496,5132 v1(6502.5,5125.5)
Input2: 
INPUT3: R14.1 U5.4 U15.29 | length 2439.2
  Top Layer w10: U5.4@4472.5,4506.69 4472.5,4592.25 R14.1@4490.25,4610 4490.25,5047.25 v1(4493,5050) ; v1(6228,5187) 6228.16,5187.16 6322.28,5187.16 U15.29@6322.65,5187.53
  Bottom Layer w10: v1(4493,5050) 4596,5153 6185,5153 6220,5188 6221,5187 v1(6228,5187)
Input3: 
INPUT4: R27.1 U11.4 U15.32 | length 2667.8
  Top Layer w10: U11.4@4235,4506.69 4235,4591 R27.1@4254,4610 v1(4254,5006) ; v1(6149,5174) 6149,5168 6188.53,5128.47 U15.32@6322.65,5128.47
  Bottom Layer w10: v1(4254,5006) 4412,5006 4578,5172 6147,5172 v1(6149,5174)
Input4: 
INPUT5: R21.1 U7.4 U15.33 | length 1744.1
  Top Layer w10: U7.4@5185,4506.69 5185,4596 R21.1@5199,4610 v1(5199,5089) ; v1(6073,5061) 6120.79,5108.79 6249.11,5108.79 6250.26,5109.94 6321.49,5109.94 U15.33@6322.65,5108.79
  Bottom Layer w10: v1(5199,5089) 5682,5089 5710,5061 v1(6073,5061)
Input5: 
MOTOR_CLK_1: U3.13 U15.43 | length 1162.4
  Top Layer w10: v1(6151,4592) 6151,4882 v1(6152,4883) ; v1(6432,4590) 6436,4590 6458.63,4567.37 U3.13@6458.63,4500.54 ; v1(6497.84,4882.84) U15.43@6497.84,4992.65
  Bottom Layer w10: v1(6151,4592) 6151,4591 6150,4590 v1(6432,4590) ; v1(6152,4883) 6497.69,4883 v1(6497.84,4882.84) 6469.84,4882.84
MOTOR_CLK_2: U10.13 U15.21 | length 1512.3
  Top Layer w10: U15.21@6438.79,5323.35 6438.79,5288.21 6457,5270 v1(6457,5271) ; v1(6974,4707) v1(6974,5239) ; v1(7105,4581) 7132.63,4553.37 U10.13@7132.63,4500.54
  Bottom Layer w10: v1(6457,5271) 6472,5271 6523,5220 6666,5220 6720,5274 6939,5274 v1(6974,5239) ; v1@6970,4703 v1@6972,4705 ; v1(6974,4707) v1@6972,4705 ; v1(7105,4581) 7105,4686 7086,4705 v1@6972,4705
MOTOR_CLK_3: U14.13 U15.26 | length 1364.3
  Top Layer w10: v1(5726,4595) 5726,4589 5765.63,4549.37 U14.13@5765.63,4500.54 ; v1(5997,4698) 5997,4732 5998,4733 v1(5998,5254) ; v1(6261,5253) 6261,5252 6266.42,5246.58 U15.26@6322.65,5246.58
  Bottom Layer w10: v1(5726,4595) 5726,4689 5735,4698 v1(5997,4698) ; v1(5998,5254) 5999,5253 6131,5253 v1(6261,5253)
MOTOR_DIR_1: U3.19 U15.46 | length 1307.7
  Top Layer w10: v1(6125.31,4389.31) 6125.16,4389.47 6125.16,4765.84 v1@6125.31,4766 ; v1@6126,4766 v1(6128,4768) ; v1(6365.69,4389.31) U3.19@6406.46,4389.31 ; v1(6543,4768) 6542,4769 6542,4927 6556.9,4941.9 U15.46@6556.9,4992.65
  Bottom Layer w10: v1(6125.31,4389.31) v1(6365.69,4389.31) ; v1(6128,4768) 6128.84,4767.16 6542.16,4767.16 v1(6543,4768)
MOTOR_DIR_2: U10.19 U15.25 | length 2223
  Top Layer w10: v1(6025,4920) v1(6025,5298) ; v1(6266,5298) 6266,5287 6286.73,5266.27 U15.25@6322.65,5266.27 ; v1(6727,4920) 6727,4653.68 6826.68,4554 v1(6826.68,4389.32) ; v1(7042.68,4389.32) U10.19@7080.46,4389.32
  Bottom Layer w10: v1(6025,4920) v1(6727,4920) ; v1(6025,5298) v1(6266,5298) ; v1(6826.68,4389.32) v1(7042.68,4389.32)
MOTOR_DIR_3: U14.19 U15.28 | length 2048
  Top Layer w10: v1(5421,4393) v1(5421,5234) ; v1(5668,4389) 5713.15,4389 U14.19@5713.46,4389.31 ; v1(6264,5208) 6264.79,5207.21 U15.28@6322.65,5207.21
  Bottom Layer w10: v1(5421,4393) 5425,4389 v1(5668,4389) ; v1(5421,5234) 5942,5234 5968,5208 v1(6264,5208)